# EAGLE board temperature-sensor (EAGLE 4.16)
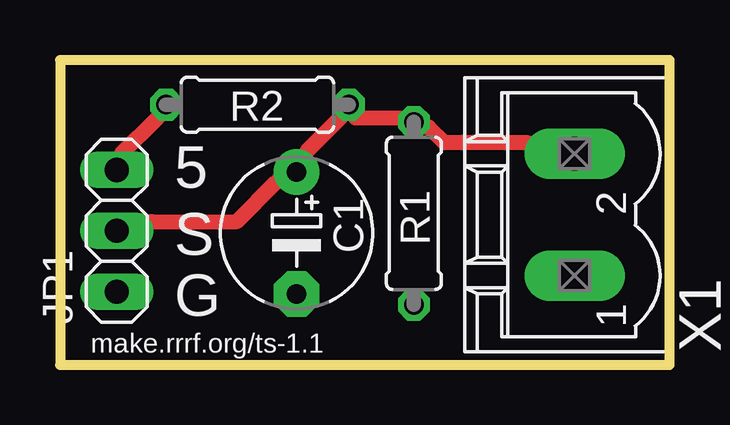
[diagram p0: board, top side]

Size 25.4 x 12.7 mm. Coordinates in mm from the lower left corner, seen from the top.
Outline: 25.4,12.7 0,12.7 0,0 25.4,0 25.4,12.7
Copper layers (1*16): Top 0.035mm / dielectric 1.5mm / Bottom 0.035mm
Design rules "default": minimum track width 10mil, minimum drill 24mil, track to track 8mil, track to pad 8mil, pad to pad 8mil, via to via 8mil, smd to smd 8mil, copper to edge 40mil, drill to drill 8mil, minimum pad ring 10mil, minimum via ring 8mil, stop-mask expansion 4mil, vias tented up to drill 0mil, thermal gap 10mil
Net classes: 0 default: width 0.635 mm

## Footprints (pad centres in the part's own frame; a part is rotated, then mirrored left to right if it is on the bottom)
E5-6 = drill 0.813 pad 1.905 round: + -2.54,0 | drill 0.813 pad 1.905 octagon: - 2.54,0
1X03 = drill 1.016 long: 1 -2.54,0; 2 0,0; 3 2.54,0
0207/7 = drill 0.813 octagon: 1 -3.81,0; 2 3.81,0
MSTBV2 = drill 1.397 long: 1 -2.54,0; 2 2.54,0

## Placement (x,y rotation side)
C1  10uF  [E5-6]  9.86,5.49 270 top
JP1  [1X03]  2.36,5.58 90 top
R1  680  [0207/7]  14.74,6.31 90 top
R2  1.6K  [0207/7]  8.22,10.84 180 top
X1  MST2V  [MSTBV2]  21.44,6.25 90 top

## Library data of the parts
C1 R1 R2 = rcl
JP1 = pinhead
X1 = con-phoenix-508

## Nets
GND: C1.- JP1.1 R1.1 X1.1
N$2: C1.+ JP1.2 R1.2 R2.1 X1.2
VCC: JP1.3 R2.2

## Tracks (layer width: path | path; a pad name or v marks a point on that pad's centre or on a via)
N$2
  Top 0.635: JP1.2 3.81,5.97 7.37,5.97 9.02,7.62 C1.+ 10.29,8.89 11.68,10.29 R2.1 12.32,10.29 14.1,10.29 R1.2 15.37,9.91 16,9.27 19.43,9.27 X1.2
VCC
  Top 0.635: R2.2 4.06,10.29 2.54,8.76 JP1.3

## Text on the board
tPlace: 5 | S | G | make.rrrf.org/ts-1.1